# Altium PCB PCB.PcbDoc (part 2 of 2)
Units mm, origin at the board's own origin, x right, y up, seen from the top; angles counter-clockwise.
Board outline 50 x 50 mm, 4 copper layers (Top Layer, VCC, GND, Bottom Layer), stack 1.586 mm thick; 94 components, 159 nets, 762 pads, 321 vias.
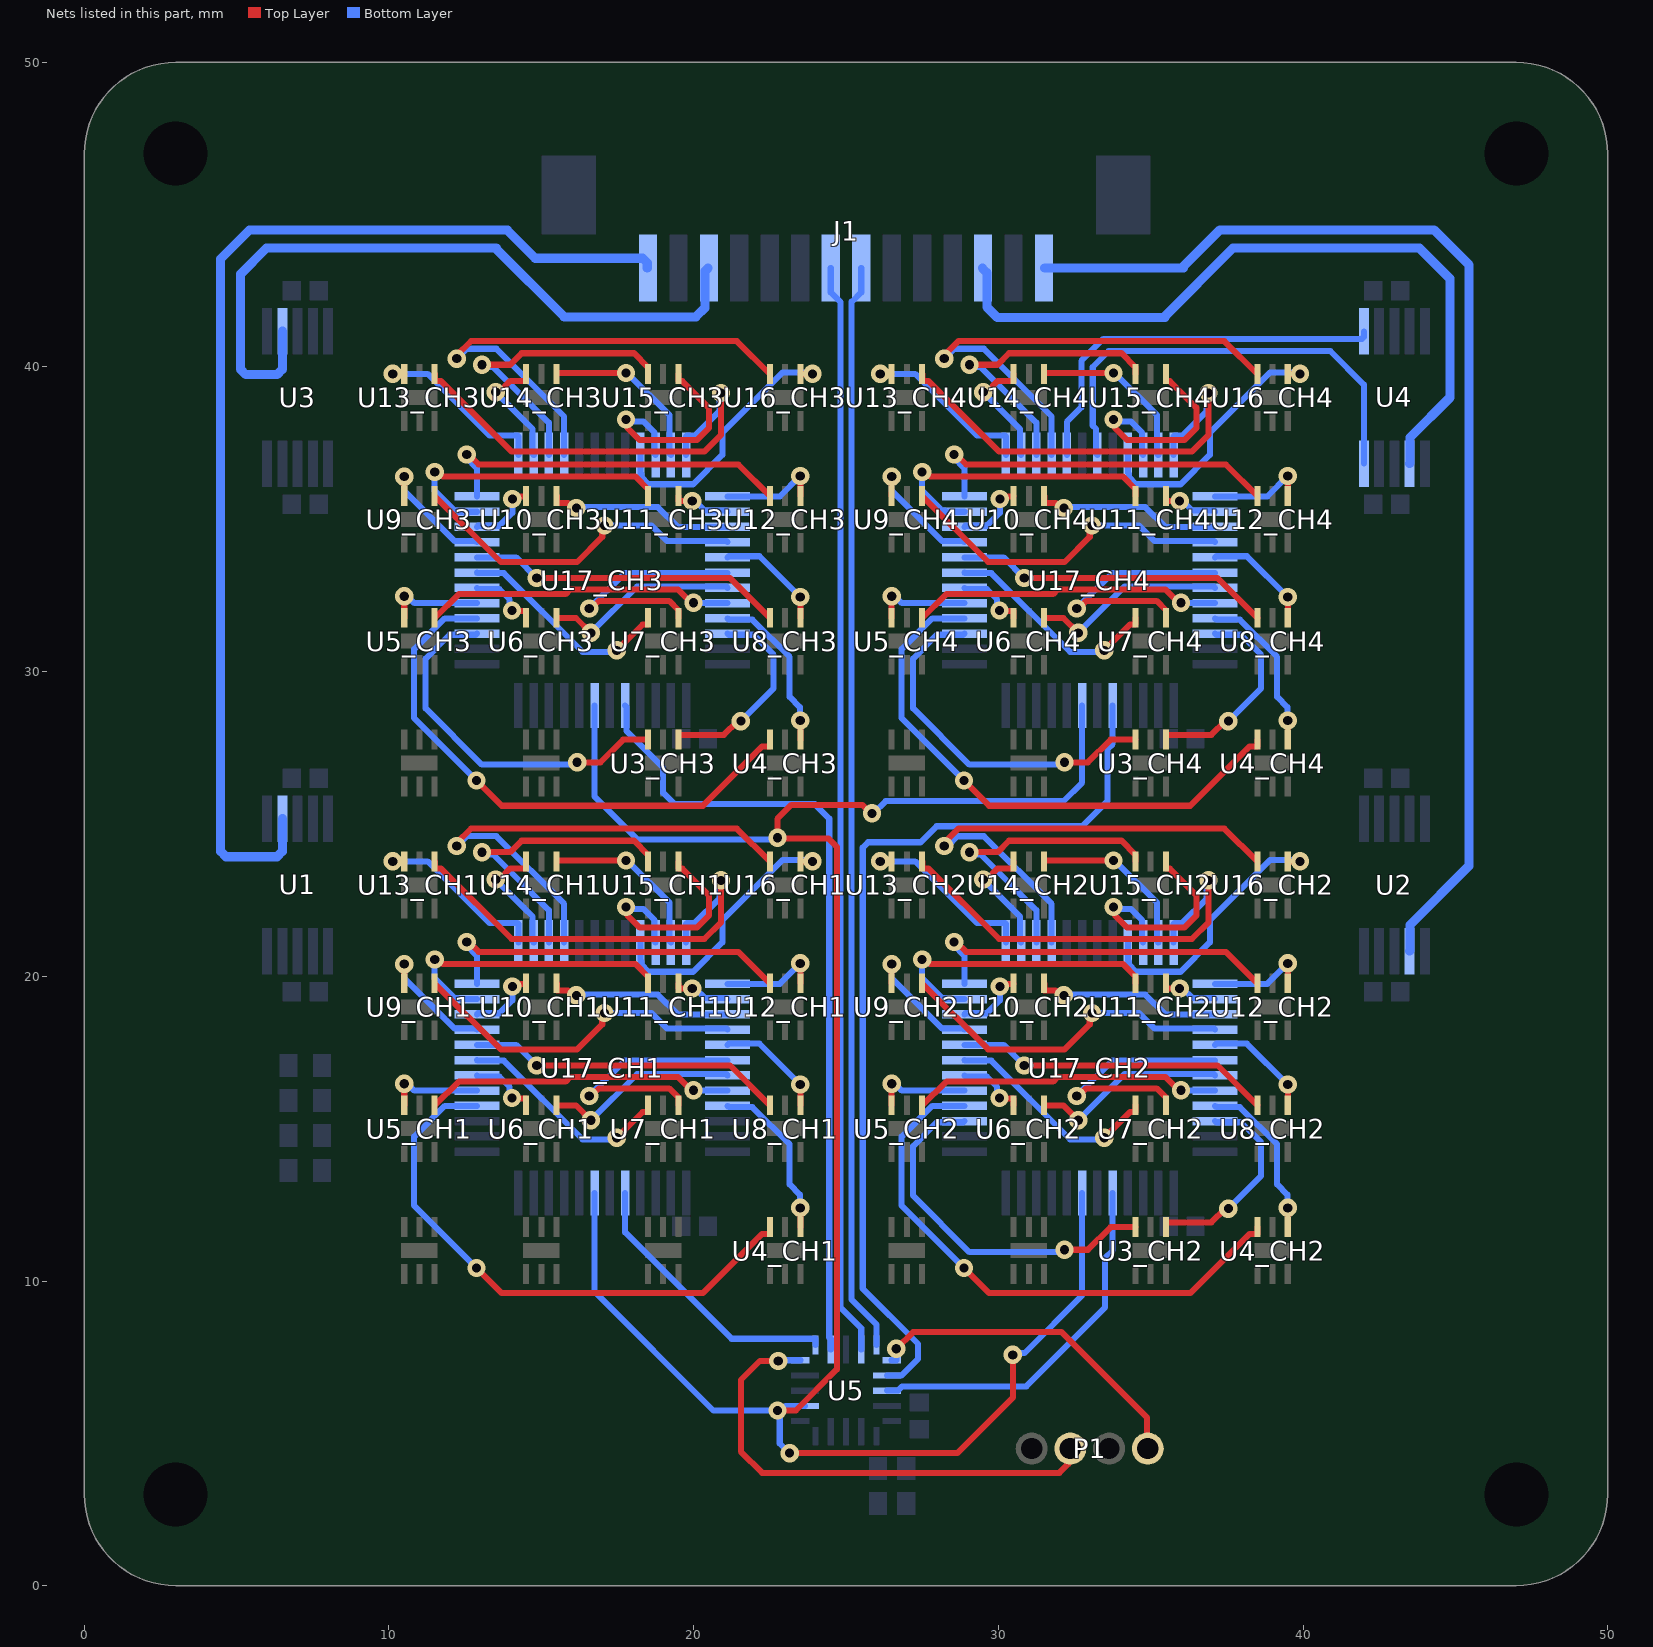
[diagram p4: the nets of this part, all layers, seen from the top]

## Via types
v1: diameter 0.6, hole 0.3, Top Layer to Bottom Layer, tented both sides, 313 vias
v2: diameter 0.9, hole 0.4, Top Layer to Bottom Layer, tented both sides, 8 vias

## Nets (pads, with @x,y where several pads share a name; then routed paths per layer and width w, separated by ;. In a path a pad name is that pad's centre, name@x,y a point inside that pad or via, vN(x,y) a via of type N, cw(c..) or ccw(c..) an arc to the next point about the centre after c; other vN are vias at no path point) (continued)
NetU3_CH2_4: U3_CH2.4 U17_CH2.10 | length 6.8
  Top Layer w0.2: U3_CH2.4@35.508,11.762 35.508,11.925 36.992,11.925 37.442,12.375 v1(37.55,12.375)
  Bottom Layer w0.2: U17_CH2.10@37.115,15.25 37.154,15.21 37.965,15.21 38.623,14.552 38.623,13.448 v1(37.55,12.375)
NetU3_CH2_6: U3_CH2.6 U17_CH2.27 | length 12.1
  Top Layer w0.2: v1(32.175,11.025) 32.942,11.025 33.687,11.77 U3_CH2.6@34.5,11.77
  Bottom Layer w0.2: U17_CH2.27@28.885,15.25 28.845,15.21 27.985,15.21 27.2,14.425 27.2,12.8 29.05,10.95 32.1,10.95 v1(32.175,11.025)
NetU3_CH3_4: U3_CH3.4 U17_CH3.10 | length 6.8
  Top Layer w0.2: U3_CH3.4@19.508,27.762 19.508,27.925 20.992,27.925 21.442,28.375 v1(21.55,28.375)
  Bottom Layer w0.2: U17_CH3.10@21.115,31.25 21.154,31.21 21.965,31.21 22.623,30.552 22.623,29.448 v1(21.55,28.375)
NetU3_CH3_6: U3_CH3.6 U17_CH3.27 | length 12.1
  Top Layer w0.2: v1(16.175,27.025) 16.942,27.025 17.687,27.77 U3_CH3.6@18.5,27.77
  Bottom Layer w0.2: U17_CH3.27@12.885,31.25 12.845,31.21 11.985,31.21 11.2,30.425 11.2,28.8 13.05,26.95 16.1,26.95 v1(16.175,27.025)
NetU3_CH4_4: U3_CH4.4 U17_CH4.10 | length 6.8
  Top Layer w0.2: U3_CH4.4@35.508,27.762 35.508,27.925 36.992,27.925 37.442,28.375 v1(37.55,28.375)
  Bottom Layer w0.2: U17_CH4.10@37.115,31.25 37.154,31.21 37.965,31.21 38.623,30.552 38.623,29.448 v1(37.55,28.375)
NetU3_CH4_6: U3_CH4.6 U17_CH4.27 | length 12.1
  Top Layer w0.2: v1(32.175,27.025) 32.942,27.025 33.687,27.77 U3_CH4.6@34.5,27.77
  Bottom Layer w0.2: U17_CH4.27@28.885,31.25 28.845,31.21 27.985,31.21 27.2,30.425 27.2,28.8 29.05,26.95 32.1,26.95 v1(32.175,27.025)
NetU4_1: U4.1 U17_CH4.41 | length 13.1
  Bottom Layer w0.2: U17_CH4.41@32.25,37.115 32.25,38.2 32.725,38.675 32.725,40.2 33.45,40.925 41.935,40.925 42,40.99 U4.1@42,41.172
NetU4_10: U4.10 U17_CH4.43 | length 15.1
  Bottom Layer w0.2: U17_CH4.43@33.25,37.115 33.21,37.154 33.21,37.965 33.1,38.075 33.1,40 33.625,40.525 40.895,40.525 42,39.42 U4.10@42,36.828
NetU4_CH1_4: U4_CH1.4 U17_CH1.9 | length 5.4
  Top Layer w0.2: v1(23.5,12.4) 23.508,12.392 U4_CH1.4@23.508,11.762
  Bottom Layer w0.2: U17_CH1.9@21.115,15.75 21.154,15.71 21.927,15.71 23.15,14.487 23.15,13.175 23.488,12.837 23.488,12.412 v1(23.5,12.4)
NetU4_CH1_6: U4_CH1.6 U17_CH1.28 | length 18.6
  Top Layer w0.2: v1(12.875,10.425) 13.7,9.6 20.3,9.6 22.245,11.545 22.5,11.545 U4_CH1.6@22.5,11.77
  Bottom Layer w0.2: v1(12.875,10.425) 10.825,12.475 10.825,14.74 11.835,15.75 U17_CH1.28@12.885,15.75
NetU4_CH2_4: U4_CH2.4 U17_CH2.9 | length 5.4
  Top Layer w0.2: v1(39.5,12.4) 39.508,12.392 U4_CH2.4@39.508,11.762
  Bottom Layer w0.2: U17_CH2.9@37.115,15.75 37.154,15.71 37.927,15.71 39.15,14.487 39.15,13.175 39.488,12.837 39.488,12.412 v1(39.5,12.4)
NetU4_CH2_6: U4_CH2.6 U17_CH2.28 | length 18.6
  Top Layer w0.2: v1(28.875,10.425) 29.7,9.6 36.3,9.6 38.245,11.545 38.5,11.545 U4_CH2.6@38.5,11.77
  Bottom Layer w0.2: v1(28.875,10.425) 26.825,12.475 26.825,14.74 27.835,15.75 U17_CH2.28@28.885,15.75
NetU4_CH3_4: U4_CH3.4 U17_CH3.9 | length 5.4
  Top Layer w0.2: v1(23.5,28.4) 23.508,28.392 U4_CH3.4@23.508,27.762
  Bottom Layer w0.2: U17_CH3.9@21.115,31.75 21.154,31.71 21.927,31.71 23.15,30.487 23.15,29.175 23.488,28.837 23.488,28.412 v1(23.5,28.4)
NetU4_CH3_6: U4_CH3.6 U17_CH3.28 | length 18.6
  Top Layer w0.2: v1(12.875,26.425) 13.7,25.6 20.3,25.6 22.245,27.545 22.5,27.545 U4_CH3.6@22.5,27.77
  Bottom Layer w0.2: v1(12.875,26.425) 10.825,28.475 10.825,30.74 11.835,31.75 U17_CH3.28@12.885,31.75
NetU4_CH4_4: U4_CH4.4 U17_CH4.9 | length 5.4
  Top Layer w0.2: v1(39.5,28.4) 39.508,28.392 U4_CH4.4@39.508,27.762
  Bottom Layer w0.2: U17_CH4.9@37.115,31.75 37.154,31.71 37.927,31.71 39.15,30.487 39.15,29.175 39.488,28.837 39.488,28.412 v1(39.5,28.4)
NetU4_CH4_6: U4_CH4.6 U17_CH4.28 | length 18.6
  Top Layer w0.2: v1(28.875,26.425) 29.7,25.6 36.3,25.6 38.245,27.545 38.5,27.545 U4_CH4.6@38.5,27.77
  Bottom Layer w0.2: v1(28.875,26.425) 26.825,28.475 26.825,30.74 27.835,31.75 U17_CH4.28@28.885,31.75
NetU5_CH1_4: U5_CH1.4 U17_CH1.8 | length 10.2
  Top Layer w0.2: U5_CH1.4@11.508,15.762 12.292,16.546 15.796,16.546 15.95,16.7 19.484,16.7 19.921,16.263 v1(19.997,16.263)
  Bottom Layer w0.2: v1(19.997,16.263) 20.004,16.256 21.108,16.256 U17_CH1.8@21.115,16.25
NetU5_CH1_6: U5_CH1.6 U17_CH1.29 | length 3.2
  Top Layer w0.2: U5_CH1.6@10.5,15.77 v1(10.5,16.475)
  Bottom Layer w0.2: v1(10.5,16.475) 10.608,16.475 10.833,16.25 U17_CH1.29@12.885,16.25
NetU5_CH2_4: U5_CH2.4 U17_CH2.8 | length 10.2
  Top Layer w0.2: U5_CH2.4@27.508,15.762 28.292,16.546 31.796,16.546 31.95,16.7 35.484,16.7 35.921,16.263 v1(35.997,16.263)
  Bottom Layer w0.2: v1(35.997,16.263) 36.004,16.256 37.108,16.256 U17_CH2.8@37.115,16.25
NetU5_CH2_6: U5_CH2.6 U17_CH2.29 | length 3.2
  Top Layer w0.2: U5_CH2.6@26.5,15.77 v1(26.5,16.475)
  Bottom Layer w0.2: v1(26.5,16.475) 26.608,16.475 26.833,16.25 U17_CH2.29@28.885,16.25
NetU5_CH3_4: U5_CH3.4 U17_CH3.8 | length 10.2
  Top Layer w0.2: U5_CH3.4@11.508,31.762 12.292,32.546 15.796,32.546 15.95,32.7 19.484,32.7 19.921,32.263 v1(19.997,32.263)
  Bottom Layer w0.2: v1(19.997,32.263) 20.004,32.256 21.108,32.256 U17_CH3.8@21.115,32.25
NetU5_CH3_6: U5_CH3.6 U17_CH3.29 | length 3.2
  Top Layer w0.2: U5_CH3.6@10.5,31.77 v1(10.5,32.475)
  Bottom Layer w0.2: v1(10.5,32.475) 10.608,32.475 10.833,32.25 U17_CH3.29@12.885,32.25
NetU5_CH4_4: U5_CH4.4 U17_CH4.8 | length 10.2
  Top Layer w0.2: U5_CH4.4@27.508,31.762 28.292,32.546 31.796,32.546 31.95,32.7 35.484,32.7 35.921,32.263 v1(35.997,32.263)
  Bottom Layer w0.2: v1(35.997,32.263) 36.004,32.256 37.108,32.256 U17_CH4.8@37.115,32.25
NetU5_CH4_6: U5_CH4.6 U17_CH4.29 | length 3.2
  Top Layer w0.2: U5_CH4.6@26.5,31.77 v1(26.5,32.475)
  Bottom Layer w0.2: v1(26.5,32.475) 26.608,32.475 26.833,32.25 U17_CH4.29@28.885,32.25
NetU6_CH1_4: U6_CH1.4 U17_CH1.7 | length 6.5
  Top Layer w0.2: U6_CH1.4@15.508,15.762 16.138,15.762 v1(16.625,15.275)
  Bottom Layer w0.2: v1(16.625,15.275) 18.14,16.79 21.075,16.79 U17_CH1.7@21.115,16.75
NetU6_CH1_6: U6_CH1.6 U17_CH1.30 | length 2.3
  Top Layer w0.2: v1(14.037,16.009) 14.051,15.995 14.5,15.995 U6_CH1.6@14.5,15.77
  Bottom Layer w0.2: U17_CH1.30@12.885,16.75 12.925,16.71 13.622,16.71 13.96,16.372 13.96,16.086 v1(14.037,16.009)
NetU6_CH2_4: U6_CH2.4 U17_CH2.7 | length 6.5
  Top Layer w0.2: U6_CH2.4@31.508,15.762 32.138,15.762 v1(32.625,15.275)
  Bottom Layer w0.2: v1(32.625,15.275) 34.14,16.79 37.075,16.79 U17_CH2.7@37.115,16.75
NetU6_CH2_6: U6_CH2.6 U17_CH2.30 | length 2.3
  Top Layer w0.2: v1(30.037,16.009) 30.051,15.995 30.5,15.995 U6_CH2.6@30.5,15.77
  Bottom Layer w0.2: U17_CH2.30@28.885,16.75 28.925,16.71 29.622,16.71 29.96,16.372 29.96,16.086 v1(30.037,16.009)
NetU6_CH3_4: U6_CH3.4 U17_CH3.7 | length 6.5
  Top Layer w0.2: U6_CH3.4@15.508,31.762 16.138,31.762 v1(16.625,31.275)
  Bottom Layer w0.2: v1(16.625,31.275) 18.14,32.79 21.075,32.79 U17_CH3.7@21.115,32.75
NetU6_CH3_6: U6_CH3.6 U17_CH3.30 | length 2.3
  Top Layer w0.2: v1(14.037,32.009) 14.051,31.995 14.5,31.995 U6_CH3.6@14.5,31.77
  Bottom Layer w0.2: U17_CH3.30@12.885,32.75 12.925,32.71 13.622,32.71 13.96,32.372 13.96,32.086 v1(14.037,32.009)
NetU6_CH4_4: U6_CH4.4 U17_CH4.7 | length 6.5
  Top Layer w0.2: U6_CH4.4@31.508,31.762 32.138,31.762 v1(32.625,31.275)
  Bottom Layer w0.2: v1(32.625,31.275) 34.14,32.79 37.075,32.79 U17_CH4.7@37.115,32.75
NetU6_CH4_6: U6_CH4.6 U17_CH4.30 | length 2.3
  Top Layer w0.2: v1(30.037,32.009) 30.051,31.995 30.5,31.995 U6_CH4.6@30.5,31.77
  Bottom Layer w0.2: U17_CH4.30@28.885,32.75 28.925,32.71 29.622,32.71 29.96,32.372 29.96,32.086 v1(30.037,32.009)
NetU7_CH1_4: U7_CH1.4 U17_CH1.6 | length 8.4
  Top Layer w0.2: v1(16.575,16.075) 16.645,16.075 16.892,16.322 19.194,16.322 19.508,16.008 U7_CH1.4@19.508,15.762
  Bottom Layer w0.2: v1(16.575,16.075) 17.736,17.236 U17_CH1.6@21.115,17.236
NetU7_CH1_6: U7_CH1.6 U17_CH1.31 | length 7.3
  Top Layer w0.2: v1(17.475,14.7) 18.32,15.545 18.5,15.545 U7_CH1.6@18.5,15.77
  Bottom Layer w0.2: U17_CH1.31@12.885,17.25 12.903,17.232 13.768,17.232 16.352,14.648 17.423,14.648 v1(17.475,14.7)
NetU7_CH2_4: U7_CH2.4 U17_CH2.6 | length 8.4
  Top Layer w0.2: v1(32.575,16.075) 32.645,16.075 32.892,16.322 35.194,16.322 35.508,16.008 U7_CH2.4@35.508,15.762
  Bottom Layer w0.2: v1(32.575,16.075) 33.736,17.236 U17_CH2.6@37.115,17.236
NetU7_CH2_6: U7_CH2.6 U17_CH2.31 | length 7.3
  Top Layer w0.2: v1(33.475,14.7) 34.32,15.545 34.5,15.545 U7_CH2.6@34.5,15.77
  Bottom Layer w0.2: U17_CH2.31@28.885,17.25 28.903,17.232 29.768,17.232 32.352,14.648 33.423,14.648 v1(33.475,14.7)
NetU7_CH3_4: U7_CH3.4 U17_CH3.6 | length 8.4
  Top Layer w0.2: v1(16.575,32.075) 16.645,32.075 16.892,32.322 19.194,32.322 19.508,32.008 U7_CH3.4@19.508,31.762
  Bottom Layer w0.2: v1(16.575,32.075) 17.736,33.236 U17_CH3.6@21.115,33.236
NetU7_CH3_6: U7_CH3.6 U17_CH3.31 | length 7.3
  Top Layer w0.2: v1(17.475,30.7) 18.32,31.545 18.5,31.545 U7_CH3.6@18.5,31.77
  Bottom Layer w0.2: U17_CH3.31@12.885,33.25 12.903,33.232 13.768,33.232 16.352,30.648 17.423,30.648 v1(17.475,30.7)
NetU7_CH4_4: U7_CH4.4 U17_CH4.6 | length 8.4
  Top Layer w0.2: v1(32.575,32.075) 32.645,32.075 32.892,32.322 35.194,32.322 35.508,32.008 U7_CH4.4@35.508,31.762
  Bottom Layer w0.2: v1(32.575,32.075) 33.736,33.236 U17_CH4.6@37.115,33.236
NetU7_CH4_6: U7_CH4.6 U17_CH4.31 | length 7.3
  Top Layer w0.2: v1(33.475,30.7) 34.32,31.545 34.5,31.545 U7_CH4.6@34.5,31.77
  Bottom Layer w0.2: U17_CH4.31@28.885,33.25 28.903,33.232 29.768,33.232 32.352,30.648 33.423,30.648 v1(33.475,30.7)
NetU8_CH1_4: U8_CH1.4 U17_CH1.5 | length 3.6
  Top Layer w0.2: v1(23.5,16.45) 23.508,16.442 U8_CH1.4@23.508,15.762
  Bottom Layer w0.2: U17_CH1.5@21.115,17.75 21.154,17.79 22.16,17.79 v1(23.5,16.45)
NetU8_CH1_6: U8_CH1.6 U17_CH1.32 | length 10.4
  Top Layer w0.2: v1(14.85,17.073) 21.197,17.073 U8_CH1.6@22.5,15.77
  Bottom Layer w0.2: U17_CH1.32@12.885,17.75 14.173,17.75 v1(14.85,17.073)
NetU8_CH2_4: U8_CH2.4 U17_CH2.5 | length 3.6
  Top Layer w0.2: v1(39.5,16.45) 39.508,16.442 U8_CH2.4@39.508,15.762
  Bottom Layer w0.2: U17_CH2.5@37.115,17.75 37.154,17.79 38.16,17.79 v1(39.5,16.45)
NetU8_CH2_6: U8_CH2.6 U17_CH2.32 | length 10.4
  Top Layer w0.2: v1(30.85,17.073) 37.197,17.073 U8_CH2.6@38.5,15.77
  Bottom Layer w0.2: U17_CH2.32@28.885,17.75 30.173,17.75 v1(30.85,17.073)
NetU8_CH3_4: U8_CH3.4 U17_CH3.5 | length 3.6
  Top Layer w0.2: v1(23.5,32.45) 23.508,32.442 U8_CH3.4@23.508,31.762
  Bottom Layer w0.2: U17_CH3.5@21.115,33.75 21.154,33.79 22.16,33.79 v1(23.5,32.45)
NetU8_CH3_6: U8_CH3.6 U17_CH3.32 | length 10.4
  Top Layer w0.2: v1(14.85,33.073) 21.197,33.073 U8_CH3.6@22.5,31.77
  Bottom Layer w0.2: U17_CH3.32@12.885,33.75 14.173,33.75 v1(14.85,33.073)
NetU8_CH4_4: U8_CH4.4 U17_CH4.5 | length 3.6
  Top Layer w0.2: v1(39.5,32.45) 39.508,32.442 U8_CH4.4@39.508,31.762
  Bottom Layer w0.2: U17_CH4.5@37.115,33.75 37.154,33.79 38.16,33.79 v1(39.5,32.45)
NetU8_CH4_6: U8_CH4.6 U17_CH4.32 | length 10.4
  Top Layer w0.2: v1(30.85,33.073) 37.197,33.073 U8_CH4.6@38.5,31.77
  Bottom Layer w0.2: U17_CH4.32@28.885,33.75 30.173,33.75 v1(30.85,33.073)
NetU9_CH1_4: U9_CH1.4 U17_CH1.4 | length 11.4
  Top Layer w0.2: U9_CH1.4@11.508,19.762 13.67,17.6 16.175,17.6 17.001,18.426 17.001,18.726 v1(17.075,18.8)
  Bottom Layer w0.2: v1(17.075,18.8) 18.613,18.8 19.124,18.29 21.075,18.29 U17_CH1.4@21.115,18.25
NetU9_CH1_6: U9_CH1.6 U17_CH1.33 | length 4.2
  Top Layer w0.2: U9_CH1.6@10.5,19.77 v1(10.5,20.4)
  Bottom Layer w0.2: v1(10.5,20.4) 10.5,19.938 12.055,18.383 12.148,18.29 12.845,18.29 U17_CH1.33@12.885,18.25
NetU9_CH2_4: U9_CH2.4 U17_CH2.4 | length 11.4
  Top Layer w0.2: U9_CH2.4@27.508,19.762 29.67,17.6 32.175,17.6 33.001,18.426 33.001,18.726 v1(33.075,18.8)
  Bottom Layer w0.2: v1(33.075,18.8) 34.613,18.8 35.124,18.29 37.075,18.29 U17_CH2.4@37.115,18.25
NetU9_CH2_6: U9_CH2.6 U17_CH2.33 | length 4.2
  Top Layer w0.2: U9_CH2.6@26.5,19.77 v1(26.5,20.4)
  Bottom Layer w0.2: v1(26.5,20.4) 26.5,19.938 28.055,18.383 28.148,18.29 28.845,18.29 U17_CH2.33@28.885,18.25
NetU9_CH3_4: U9_CH3.4 U17_CH3.4 | length 11.4
  Top Layer w0.2: U9_CH3.4@11.508,35.762 13.67,33.6 16.175,33.6 17.001,34.426 17.001,34.726 v1(17.075,34.8)
  Bottom Layer w0.2: v1(17.075,34.8) 18.613,34.8 19.124,34.29 21.075,34.29 U17_CH3.4@21.115,34.25
NetU9_CH3_6: U9_CH3.6 U17_CH3.33 | length 4.2
  Top Layer w0.2: U9_CH3.6@10.5,35.77 v1(10.5,36.4)
  Bottom Layer w0.2: v1(10.5,36.4) 10.5,35.938 12.055,34.383 12.148,34.29 12.845,34.29 U17_CH3.33@12.885,34.25
NetU9_CH4_4: U9_CH4.4 U17_CH4.4 | length 11.4
  Top Layer w0.2: U9_CH4.4@27.508,35.762 29.67,33.6 32.175,33.6 33.001,34.426 33.001,34.726 v1(33.075,34.8)
  Bottom Layer w0.2: v1(33.075,34.8) 34.613,34.8 35.124,34.29 37.075,34.29 U17_CH4.4@37.115,34.25
NetU9_CH4_6: U9_CH4.6 U17_CH4.33 | length 4.2
  Top Layer w0.2: U9_CH4.6@26.5,35.77 v1(26.5,36.4)
  Bottom Layer w0.2: v1(26.5,36.4) 26.5,35.938 28.055,34.383 28.148,34.29 28.845,34.29 U17_CH4.33@28.885,34.25
NetU10_CH1_4: U10_CH1.4 U17_CH1.3 | length 6.2
  Top Layer w0.2: U10_CH1.4@15.508,19.762 15.508,19.537 15.88,19.537 16.042,19.375 v1(16.15,19.375)
  Bottom Layer w0.2: v1(16.15,19.375) 16.175,19.4 18.825,19.4 19.475,18.75 U17_CH1.3@21.115,18.75
NetU10_CH1_6: U10_CH1.6 U17_CH1.34 | length 2.4
  Top Layer w0.2: v1(14.049,19.669) 14.049,19.75 14.5,19.75 U10_CH1.6@14.5,19.77
  Bottom Layer w0.2: U17_CH1.34@12.885,18.75 12.925,18.79 13.622,18.79 14.049,19.216 v1(14.049,19.669)
NetU10_CH2_4: U10_CH2.4 U17_CH2.3 | length 6.2
  Top Layer w0.2: U10_CH2.4@31.508,19.762 31.508,19.537 31.88,19.537 32.042,19.375 v1(32.15,19.375)
  Bottom Layer w0.2: v1(32.15,19.375) 32.175,19.4 34.825,19.4 35.475,18.75 U17_CH2.3@37.115,18.75
NetU10_CH2_6: U10_CH2.6 U17_CH2.34 | length 2.4
  Top Layer w0.2: v1(30.049,19.669) 30.049,19.75 30.5,19.75 U10_CH2.6@30.5,19.77
  Bottom Layer w0.2: U17_CH2.34@28.885,18.75 28.925,18.79 29.622,18.79 30.049,19.216 v1(30.049,19.669)
NetU10_CH3_4: U10_CH3.4 U17_CH3.3 | length 6.2
  Top Layer w0.2: U10_CH3.4@15.508,35.762 15.508,35.537 15.88,35.537 16.042,35.375 v1(16.15,35.375)
  Bottom Layer w0.2: v1(16.15,35.375) 16.175,35.4 18.825,35.4 19.475,34.75 U17_CH3.3@21.115,34.75
NetU10_CH3_6: U10_CH3.6 U17_CH3.34 | length 2.4
  Top Layer w0.2: v1(14.049,35.669) 14.049,35.75 14.5,35.75 U10_CH3.6@14.5,35.77
  Bottom Layer w0.2: U17_CH3.34@12.885,34.75 12.925,34.79 13.622,34.79 14.049,35.216 v1(14.049,35.669)
NetU10_CH4_4: U10_CH4.4 U17_CH4.3 | length 6.2
  Top Layer w0.2: U10_CH4.4@31.508,35.762 31.508,35.537 31.88,35.537 32.042,35.375 v1(32.15,35.375)
  Bottom Layer w0.2: v1(32.15,35.375) 32.175,35.4 34.825,35.4 35.475,34.75 U17_CH4.3@37.115,34.75
NetU10_CH4_6: U10_CH4.6 U17_CH4.34 | length 2.4
  Top Layer w0.2: v1(30.049,35.669) 30.049,35.75 30.5,35.75 U10_CH4.6@30.5,35.77
  Bottom Layer w0.2: U17_CH4.34@28.885,34.75 28.925,34.79 29.622,34.79 30.049,35.216 v1(30.049,35.669)
NetU11_CH1_4: U11_CH1.4 U17_CH1.2 | length 1.9
  Top Layer w0.2: U11_CH1.4@19.508,19.762 19.508,19.599 v1(19.951,19.599)
  Bottom Layer w0.2: v1(19.951,19.599) 20.06,19.599 20.369,19.29 21.075,19.29 U17_CH1.2@21.115,19.25
NetU11_CH1_6: U11_CH1.6 U17_CH1.35 | length 9.7
  Top Layer w0.2: v1(11.5,20.55) 11.608,20.55 11.758,20.4 18.095,20.4 18.5,19.995 U11_CH1.6@18.5,19.77
  Bottom Layer w0.2: v1(11.5,20.55) 11.5,19.938 12.055,19.383 12.148,19.29 12.249,19.29 12.288,19.25 U17_CH1.35@12.885,19.25
NetU11_CH2_4: U11_CH2.4 U17_CH2.2 | length 1.9
  Top Layer w0.2: U11_CH2.4@35.508,19.762 35.508,19.599 v1(35.951,19.599)
  Bottom Layer w0.2: v1(35.951,19.599) 36.06,19.599 36.369,19.29 37.075,19.29 U17_CH2.2@37.115,19.25
NetU11_CH2_6: U11_CH2.6 U17_CH2.35 | length 9.7
  Top Layer w0.2: v1(27.5,20.55) 27.608,20.55 27.758,20.4 34.095,20.4 34.5,19.995 U11_CH2.6@34.5,19.77
  Bottom Layer w0.2: v1(27.5,20.55) 27.5,19.938 28.055,19.383 28.148,19.29 28.249,19.29 28.288,19.25 U17_CH2.35@28.885,19.25
NetU11_CH3_4: U11_CH3.4 U17_CH3.2 | length 1.9
  Top Layer w0.2: U11_CH3.4@19.508,35.762 19.508,35.599 v1(19.951,35.599)
  Bottom Layer w0.2: v1(19.951,35.599) 20.06,35.599 20.369,35.29 21.075,35.29 U17_CH3.2@21.115,35.25
NetU11_CH3_6: U11_CH3.6 U17_CH3.35 | length 9.7
  Top Layer w0.2: v1(11.5,36.55) 11.608,36.55 11.758,36.4 18.095,36.4 18.5,35.995 U11_CH3.6@18.5,35.77
  Bottom Layer w0.2: v1(11.5,36.55) 11.5,35.938 12.055,35.383 12.148,35.29 12.249,35.29 12.288,35.25 U17_CH3.35@12.885,35.25
NetU11_CH4_4: U11_CH4.4 U17_CH4.2 | length 1.9
  Top Layer w0.2: U11_CH4.4@35.508,35.762 35.508,35.599 v1(35.951,35.599)
  Bottom Layer w0.2: v1(35.951,35.599) 36.06,35.599 36.369,35.29 37.075,35.29 U17_CH4.2@37.115,35.25
NetU11_CH4_6: U11_CH4.6 U17_CH4.35 | length 9.7
  Top Layer w0.2: v1(27.5,36.55) 27.608,36.55 27.758,36.4 34.095,36.4 34.5,35.995 U11_CH4.6@34.5,35.77
  Bottom Layer w0.2: v1(27.5,36.55) 27.5,35.938 28.055,35.383 28.148,35.29 28.249,35.29 28.288,35.25 U17_CH4.35@28.885,35.25
NetU12_CH1_4: U12_CH1.4 U17_CH1.1 | length 3.3
  Top Layer w0.2: v1(23.5,20.425) 23.508,20.417 U12_CH1.4@23.508,19.762
  Bottom Layer w0.2: U17_CH1.1@21.115,19.75 22.825,19.75 v1(23.5,20.425)
NetU12_CH1_6: U12_CH1.6 U17_CH1.36 | length 12
  Top Layer w0.2: v1(12.55,21.125) 12.619,21.125 12.944,20.8 21.47,20.8 U12_CH1.6@22.5,19.77
  Bottom Layer w0.2: v1(12.55,21.125) 12.55,21.017 12.885,20.682 U17_CH1.36@12.885,19.75
NetU12_CH2_4: U12_CH2.4 U17_CH2.1 | length 3.3
  Top Layer w0.2: v1(39.5,20.425) 39.508,20.417 U12_CH2.4@39.508,19.762
  Bottom Layer w0.2: U17_CH2.1@37.115,19.75 38.825,19.75 v1(39.5,20.425)
NetU12_CH2_6: U12_CH2.6 U17_CH2.36 | length 12
  Top Layer w0.2: v1(28.55,21.125) 28.619,21.125 28.944,20.8 37.47,20.8 U12_CH2.6@38.5,19.77
  Bottom Layer w0.2: v1(28.55,21.125) 28.55,21.017 28.885,20.682 U17_CH2.36@28.885,19.75
NetU12_CH3_4: U12_CH3.4 U17_CH3.1 | length 3.3
  Top Layer w0.2: v1(23.5,36.425) 23.508,36.417 U12_CH3.4@23.508,35.762
  Bottom Layer w0.2: U17_CH3.1@21.115,35.75 22.825,35.75 v1(23.5,36.425)
NetU12_CH3_6: U12_CH3.6 U17_CH3.36 | length 12
  Top Layer w0.2: v1(12.55,37.125) 12.619,37.125 12.944,36.8 21.47,36.8 U12_CH3.6@22.5,35.77
  Bottom Layer w0.2: v1(12.55,37.125) 12.55,37.017 12.885,36.682 U17_CH3.36@12.885,35.75
NetU12_CH4_4: U12_CH4.4 U17_CH4.1 | length 3.3
  Top Layer w0.2: v1(39.5,36.425) 39.508,36.417 U12_CH4.4@39.508,35.762
  Bottom Layer w0.2: U17_CH4.1@37.115,35.75 38.825,35.75 v1(39.5,36.425)
NetU12_CH4_6: U12_CH4.6 U17_CH4.36 | length 12
  Top Layer w0.2: v1(28.55,37.125) 28.619,37.125 28.944,36.8 37.47,36.8 U12_CH4.6@38.5,35.77
  Bottom Layer w0.2: v1(28.55,37.125) 28.55,37.017 28.885,36.682 U17_CH4.36@28.885,35.75
NetU13_CH1_4: U13_CH1.4 U17_CH1.48 | length 14.8
  Top Layer w0.2: U13_CH1.4@11.508,23.762 11.508,23.537 11.713,23.537 14.025,21.225 20.35,21.225 20.9,21.775 v1(20.9,23.15)
  Bottom Layer w0.2: U17_CH1.48@19.75,21.115 19.75,21.712 19.79,21.751 20.043,21.751 20.841,22.55 20.841,23.091 v1(20.9,23.15)
NetU13_CH1_6: U13_CH1.6 U17_CH1.37 | length 6
  Top Layer w0.2: v1(10.125,23.775) 10.5,23.775 U13_CH1.6@10.5,23.77
  Bottom Layer w0.2: v1(10.125,23.775) 11.27,23.775 13.294,21.751 14.21,21.751 14.25,21.712 U17_CH1.37@14.25,21.115
NetU13_CH2_4: U13_CH2.4 U17_CH2.48 | length 14.8
  Top Layer w0.2: U13_CH2.4@27.508,23.762 27.508,23.537 27.713,23.537 30.025,21.225 36.35,21.225 36.9,21.775 v1(36.9,23.15)
  Bottom Layer w0.2: U17_CH2.48@35.75,21.115 35.75,21.712 35.79,21.751 36.043,21.751 36.841,22.55 36.841,23.091 v1(36.9,23.15)
NetU13_CH2_6: U13_CH2.6 U17_CH2.37 | length 6
  Top Layer w0.2: v1(26.125,23.775) 26.5,23.775 U13_CH2.6@26.5,23.77
  Bottom Layer w0.2: v1(26.125,23.775) 27.27,23.775 29.294,21.751 30.21,21.751 30.25,21.712 U17_CH2.37@30.25,21.115
NetU13_CH3_4: U13_CH3.4 U17_CH3.48 | length 14.8
  Top Layer w0.2: U13_CH3.4@11.508,39.762 11.508,39.537 11.713,39.537 14.025,37.225 20.35,37.225 20.9,37.775 v1(20.9,39.15)
  Bottom Layer w0.2: U17_CH3.48@19.75,37.115 19.75,37.712 19.79,37.751 20.043,37.751 20.841,38.55 20.841,39.091 v1(20.9,39.15)
NetU13_CH3_6: U13_CH3.6 U17_CH3.37 | length 6
  Top Layer w0.2: v1(10.125,39.775) 10.5,39.775 U13_CH3.6@10.5,39.77
  Bottom Layer w0.2: v1(10.125,39.775) 11.27,39.775 13.294,37.751 14.21,37.751 14.25,37.712 U17_CH3.37@14.25,37.115
NetU13_CH4_4: U13_CH4.4 U17_CH4.48 | length 14.8
  Top Layer w0.2: U13_CH4.4@27.508,39.762 27.508,39.537 27.713,39.537 30.025,37.225 36.35,37.225 36.9,37.775 v1(36.9,39.15)
  Bottom Layer w0.2: U17_CH4.48@35.75,37.115 35.75,37.712 35.79,37.751 36.043,37.751 36.841,38.55 36.841,39.091 v1(36.9,39.15)
NetU13_CH4_6: U13_CH4.6 U17_CH4.37 | length 6
  Top Layer w0.2: v1(26.125,39.775) 26.5,39.775 U13_CH4.6@26.5,39.77
  Bottom Layer w0.2: v1(26.125,39.775) 27.27,39.775 29.294,37.751 30.21,37.751 30.25,37.712 U17_CH4.37@30.25,37.115
NetU14_CH1_4: U14_CH1.4 U17_CH1.47 | length 5.6
  Top Layer w0.2: U14_CH1.4@15.508,23.762 15.508,23.8 v1(17.777,23.8)
  Bottom Layer w0.2: v1(17.777,23.8) 17.825,23.8 19.21,22.415 19.21,21.154 U17_CH1.47@19.25,21.115
NetU14_CH1_6: U14_CH1.6 U17_CH1.38 | length 4
  Top Layer w0.2: v1(13.504,23.175) 13.612,23.175 13.982,23.545 14.5,23.545 U14_CH1.6@14.5,23.77
  Bottom Layer w0.2: v1(13.504,23.175) 14.425,22.254 14.71,21.968 14.71,21.154 U17_CH1.38@14.75,21.115
NetU14_CH2_4: U14_CH2.4 U17_CH2.47 | length 5.6
  Top Layer w0.2: U14_CH2.4@31.508,23.762 31.508,23.8 v1(33.777,23.8)
  Bottom Layer w0.2: v1(33.777,23.8) 33.825,23.8 35.21,22.415 35.21,21.154 U17_CH2.47@35.25,21.115
NetU14_CH2_6: U14_CH2.6 U17_CH2.38 | length 4
  Top Layer w0.2: v1(29.504,23.175) 29.612,23.175 29.982,23.545 30.5,23.545 U14_CH2.6@30.5,23.77
  Bottom Layer w0.2: v1(29.504,23.175) 30.425,22.254 30.71,21.968 30.71,21.154 U17_CH2.38@30.75,21.115
NetU14_CH3_4: U14_CH3.4 U17_CH3.47 | length 5.6
  Top Layer w0.2: U14_CH3.4@15.508,39.762 15.508,39.8 v1(17.777,39.8)
  Bottom Layer w0.2: v1(17.777,39.8) 17.825,39.8 19.21,38.415 19.21,37.154 U17_CH3.47@19.25,37.115
NetU14_CH3_6: U14_CH3.6 U17_CH3.38 | length 4
  Top Layer w0.2: v1(13.504,39.175) 13.612,39.175 13.982,39.545 14.5,39.545 U14_CH3.6@14.5,39.77
  Bottom Layer w0.2: v1(13.504,39.175) 14.425,38.254 14.71,37.968 14.71,37.154 U17_CH3.38@14.75,37.115
NetU14_CH4_4: U14_CH4.4 U17_CH4.47 | length 5.6
  Top Layer w0.2: U14_CH4.4@31.508,39.762 31.508,39.8 v1(33.777,39.8)
  Bottom Layer w0.2: v1(33.777,39.8) 33.825,39.8 35.21,38.415 35.21,37.154 U17_CH4.47@35.25,37.115
NetU14_CH4_6: U14_CH4.6 U17_CH4.38 | length 4
  Top Layer w0.2: v1(29.504,39.175) 29.612,39.175 29.982,39.545 30.5,39.545 U14_CH4.6@30.5,39.77
  Bottom Layer w0.2: v1(29.504,39.175) 30.425,38.254 30.71,37.968 30.71,37.154 U17_CH4.38@30.75,37.115
NetU15_CH1_4: U15_CH1.4 U17_CH1.46 | length 7.4
  Top Layer w0.2: v1(17.777,22.278) 17.827,22.229 17.827,21.998 18.225,21.6 20.108,21.6 20.5,21.992 20.5,22.666 19.629,23.537 19.508,23.537 U15_CH1.4@19.508,23.762
  Bottom Layer w0.2: v1(17.777,22.278) 17.843,22.212 18.35,22.212 18.71,21.852 18.71,21.154 U17_CH1.46@18.75,21.115
NetU15_CH1_6: U15_CH1.6 U17_CH1.39 | length 10.1
  Top Layer w0.2: v1(13.05,24.073) 13.052,24.075 13.975,24.075 14.35,24.45 18.045,24.45 18.5,23.995 U15_CH1.6@18.5,23.77
  Bottom Layer w0.2: v1(13.05,24.073) 13.125,23.998 13.425,23.998 15.25,22.174 U17_CH1.39@15.25,21.115
NetU15_CH2_4: U15_CH2.4 U17_CH2.46 | length 7.4
  Top Layer w0.2: v1(33.777,22.278) 33.827,22.229 33.827,21.998 34.225,21.6 36.108,21.6 36.5,21.992 36.5,22.666 35.629,23.537 35.508,23.537 U15_CH2.4@35.508,23.762
  Bottom Layer w0.2: v1(33.777,22.278) 33.843,22.212 34.35,22.212 34.71,21.852 34.71,21.154 U17_CH2.46@34.75,21.115
NetU15_CH2_6: U15_CH2.6 U17_CH2.39 | length 10.1
  Top Layer w0.2: v1(29.05,24.071) 29.054,24.075 29.975,24.075 30.35,24.45 34.045,24.45 34.5,23.995 U15_CH2.6@34.5,23.77
  Bottom Layer w0.2: v1(29.05,24.071) 29.123,23.998 29.425,23.998 31.25,22.174 U17_CH2.39@31.25,21.115
NetU15_CH3_4: U15_CH3.4 U17_CH3.46 | length 7.4
  Top Layer w0.2: v1(17.777,38.278) 17.827,38.229 17.827,37.998 18.225,37.6 20.108,37.6 20.5,37.992 20.5,38.666 19.629,39.537 19.508,39.537 U15_CH3.4@19.508,39.762
  Bottom Layer w0.2: v1(17.777,38.278) 17.843,38.212 18.35,38.212 18.71,37.852 18.71,37.154 U17_CH3.46@18.75,37.115
NetU15_CH3_6: U15_CH3.6 U17_CH3.39 | length 10.1
  Top Layer w0.2: v1(13.05,40.073) 13.052,40.075 13.975,40.075 14.35,40.45 18.045,40.45 18.5,39.995 U15_CH3.6@18.5,39.77
  Bottom Layer w0.2: v1(13.05,40.073) 13.125,39.998 13.425,39.998 15.25,38.174 U17_CH3.39@15.25,37.115
NetU15_CH4_4: U15_CH4.4 U17_CH4.46 | length 7.4
  Top Layer w0.2: v1(33.777,38.278) 33.827,38.229 33.827,37.998 34.225,37.6 36.108,37.6 36.5,37.992 36.5,38.666 35.629,39.537 35.508,39.537 U15_CH4.4@35.508,39.762
  Bottom Layer w0.2: v1(33.777,38.278) 33.843,38.212 34.35,38.212 34.71,37.852 34.71,37.154 U17_CH4.46@34.75,37.115
NetU15_CH4_6: U15_CH4.6 U17_CH4.39 | length 10.1
  Top Layer w0.2: v1(29.05,40.073) 29.052,40.075 29.975,40.075 30.35,40.45 34.045,40.45 34.5,39.995 U15_CH4.6@34.5,39.77
  Bottom Layer w0.2: v1(29.05,40.073) 29.125,39.998 29.425,39.998 31.25,38.174 U17_CH4.39@31.25,37.115
NetU16_CH1_4: U16_CH1.4 U17_CH1.45 | length 8.8
  Top Layer w0.2: U16_CH1.4@23.508,23.762 23.508,23.775 v1(23.9,23.775)
  Bottom Layer w0.2: U17_CH1.45@18.25,21.115 18.25,20.518 18.29,20.478 18.29,20.378 18.516,20.151 19.984,20.151 20.945,21.113 20.945,21.845 22.922,23.822 23.853,23.822 v1(23.9,23.775)
NetU16_CH1_6: U16_CH1.6 U17_CH1.40 | length 16.9
  Top Layer w0.2: v1(12.225,24.275) 12.225,24.383 12.692,24.85 21.42,24.85 U16_CH1.6@22.5,23.77
  Bottom Layer w0.2: v1(12.225,24.275) 12.55,24.6 13.525,24.6 15.75,22.375 U17_CH1.40@15.75,21.115
NetU16_CH2_4: U16_CH2.4 U17_CH2.45 | length 8.8
  Top Layer w0.2: U16_CH2.4@39.508,23.762 39.508,23.775 v1(39.9,23.775)
  Bottom Layer w0.2: U17_CH2.45@34.25,21.115 34.25,20.518 34.29,20.478 34.29,20.378 34.516,20.151 35.984,20.151 36.945,21.113 36.945,21.845 38.922,23.822 39.853,23.822 v1(39.9,23.775)
NetU16_CH2_6: U16_CH2.6 U17_CH2.40 | length 16.9
  Top Layer w0.2: v1(28.225,24.275) 28.225,24.383 28.692,24.85 37.42,24.85 U16_CH2.6@38.5,23.77
  Bottom Layer w0.2: v1(28.225,24.275) 28.333,24.275 28.656,24.598 29.527,24.598 31.75,22.375 U17_CH2.40@31.75,21.115
NetU16_CH3_4: U16_CH3.4 U17_CH3.45 | length 8.8
  Top Layer w0.2: U16_CH3.4@23.508,39.762 23.508,39.775 v1(23.9,39.775)
  Bottom Layer w0.2: U17_CH3.45@18.25,37.115 18.25,36.518 18.29,36.478 18.29,36.378 18.516,36.151 19.984,36.151 20.945,37.113 20.945,37.845 22.922,39.822 23.853,39.822 v1(23.9,39.775)
NetU16_CH3_6: U16_CH3.6 U17_CH3.40 | length 16.9
  Top Layer w0.2: v1(12.225,40.275) 12.225,40.383 12.692,40.85 21.42,40.85 U16_CH3.6@22.5,39.77
  Bottom Layer w0.2: v1(12.225,40.275) 12.55,40.6 13.525,40.6 15.75,38.375 U17_CH3.40@15.75,37.115
NetU16_CH4_4: U16_CH4.4 U17_CH4.45 | length 8.8
  Top Layer w0.2: U16_CH4.4@39.508,39.762 39.508,39.775 v1(39.9,39.775)
  Bottom Layer w0.2: U17_CH4.45@34.25,37.115 34.25,36.518 34.29,36.478 34.29,36.378 34.516,36.151 35.984,36.151 36.945,37.113 36.945,37.845 38.922,39.822 39.853,39.822 v1(39.9,39.775)
NetU16_CH4_6: U16_CH4.6 U17_CH4.40 | length 16.9
  Top Layer w0.2: v1(28.225,40.275) 28.225,40.383 28.692,40.85 37.42,40.85 U16_CH4.6@38.5,39.77
  Bottom Layer w0.2: v1(28.225,40.275) 28.55,40.6 29.525,40.6 31.75,38.375 U17_CH4.40@31.75,37.115
OUT1: J1.1 U1.7 | length 37.7
  Bottom Layer w0.3: U1.7@6.5,25.172 6.5,24.101 6.324,23.925 4.651,23.925 4.475,24.101 4.475,43.55 5.425,44.5 13.894,44.5 ; 13.869,44.5 14.8,43.569 18.325,43.569 18.475,43.419 J1.1@18.475,43.25
OUT2: J1.14 U2.7 | length 38.3
  Bottom Layer w0.3: J1.14@31.525,43.25 36.075,43.25 ; 36.025,43.25 37.275,44.5 44.3,44.5 45.45,43.35 45.45,23.625 43.515,21.69 43.515,20.843 U2.7@43.5,20.828
OUT3: J1.3 U3.7 | length 23.9
  Bottom Layer w0.3: U3.7@6.5,41.172 6.5,39.926 6.324,39.75 5.301,39.75 5.125,39.926 5.125,43.05 5.975,43.9 13.519,43.9 ; 13.494,43.9 15.75,41.644 20.074,41.644 20.372,41.942 20.372,43.147 J1.3@20.475,43.25
OUT4: J1.12 U4.7 | length 24.7
  Bottom Layer w0.3: J1.12@29.475,43.244 29.625,43.094 29.625,41.969 29.969,41.625 ; 29.994,41.625 35.475,41.625 ; 35.425,41.625 37.7,43.9 43.825,43.9 44.825,42.9 44.825,39 43.515,37.69 43.515,36.843 U4.7@43.5,36.828
RST: P1.4 U5.1 | length 11.2
  Top Layer w0.2: v1(26.65,7.775) 27.2,8.325 32.075,8.325 34.885,5.515 P1.4@34.885,4.5
  Bottom Layer w0.2: U5.1@26.499,7.4 26.648,7.4 26.65,7.402 v1(26.65,7.775)
SCLK: U5.12 U17_CH1.19 U17_CH2.19 U17_CH3.19 U17_CH4.19 | length 74.2
  Top Layer w0.2: v1(22.75,5.748) 22.752,5.75 23.35,5.75 24.7,7.1 24.7,24.25 24.427,24.523 22.777,24.523 v1(22.75,24.55) 22.75,25.17 23.207,25.627 25.533,25.627 25.81,25.35 v1(25.85,25.35) ; v1(23.15,4.35) 28.65,4.35 30.475,6.175 v1(30.475,7.575)
  Bottom Layer w0.2: U17_CH1.19@16.75,12.885 16.75,9.65 20.652,5.748 v1(22.75,5.748) 22.827,5.672 22.827,4.667 23.144,4.35 v1(23.15,4.35) ; U17_CH3.19@16.75,28.885 16.75,25.9 18.155,24.495 22.695,24.495 v1(22.75,24.55) ; v1@23.008,5.898 23.652,5.898 U5.12@23.654,5.9 ; v1(25.85,25.35) 25.899,25.35 26.299,25.75 32.14,25.75 32.75,26.36 U17_CH4.19@32.75,28.885 ; v1(30.475,7.575) 30.537,7.637 30.862,7.637 32.75,9.525 U17_CH2.19@32.75,12.885
SWIM: P1.2 U5.15 | length 15.7
  Top Layer w0.2: v1(22.775,7.375) 22.175,7.375 21.55,6.75 21.55,4.4 22.25,3.7 32,3.7 P1.2@32.301,4.001
  Bottom Layer w0.2: v1(22.775,7.375) 22.798,7.398 23.5,7.398 U5.15@23.501,7.4
SYNC1: U5.16 U17_CH1.17 | length 9.2
  Bottom Layer w0.2: U17_CH1.17@17.75,12.885 17.75,11.6 21.247,8.103 23.998,8.103 24,8.102 U5.16@24,7.899
SYNC2: U5.3 U17_CH2.17 | length 12.1
  Bottom Layer w0.2: U5.3@26.346,6.4 26.348,6.402 26.703,6.402 26.844,6.542 30.917,6.542 33.5,9.125 33.5,10.75 33.75,11 U17_CH2.17@33.75,12.885
SYNC3: U5.17 U17_CH3.17 | length 26.6
  Bottom Layer w0.2: U17_CH3.17@17.75,28.885 17.79,28.845 17.79,28.06 19,26.85 19,26.025 19.375,25.65 23.975,25.65 24.45,25.175 24.45,8.152 24.5,8.102 U5.17@24.5,7.746
SYNC4: U5.2 U17_CH4.17 | length 30.6
  Bottom Layer w0.2: U5.2@26.346,6.9 U5.2@26.346,6.9 26.826,6.902 27.367,7.443 27.367,7.933 25.55,9.75 25.55,24.225 25.725,24.4 27.45,24.4 27.975,24.925 32.75,24.925 33.577,25.752 33.577,27.452 33.75,27.625 U17_CH4.17@33.75,28.885
UART_RX: J1.8 U5.20 | length 35.8
  Bottom Layer w0.2: 25.175,42.15 25.175,9.4 26,8.575 U5.20@26,7.899 ; J1.8@25.2,42.15 25.5,42.45 J1.8@25.5,43.25
UART_TX: J1.7 U5.19 | length 35.9
  Bottom Layer w0.2: J1.7@24.5,43.25 24.5,42.45 24.825,42.125 24.825,9.125 25.5,8.45 U5.19@25.5,7.746
pads on no net: J1.MP1 J1.MP2 U1_CH1.2 U1_CH1.5 U1_CH1.7 U1_CH2.2 U1_CH2.5 U1_CH2.7 U1_CH3.2 U1_CH3.5 U1_CH3.7 U1_CH4.2 U1_CH4.5 U1_CH4.7 U2_CH1.2 U2_CH1.5 U2_CH1.7 U2_CH2.2 U2_CH2.5 U2_CH2.7 U2_CH3.2 U2_CH3.5 U2_CH3.7 U2_CH4.2 U2_CH4.5 U2_CH4.7 U3_CH1.2 U3_CH1.5 U3_CH1.7 U3_CH2.2 U3_CH2.5 U3_CH2.7 U3_CH3.2 U3_CH3.5 U3_CH3.7 U3_CH4.2 U3_CH4.5 U3_CH4.7 U4_CH1.2 U4_CH1.5 U4_CH1.7 U4_CH2.2 U4_CH2.5 U4_CH2.7 U4_CH3.2 U4_CH3.5 U4_CH3.7 U4_CH4.2 U4_CH4.5 U4_CH4.7 U5.10 U5.11 U5.14 U5.18 U5_CH1.2 U5_CH1.5 U5_CH1.7 U5_CH2.2 U5_CH2.5 U5_CH2.7 U5_CH3.2 U5_CH3.5 U5_CH3.7 U5_CH4.2 U5_CH4.5 U5_CH4.7 U6_CH1.2 U6_CH1.5 U6_CH1.7 U6_CH2.2 U6_CH2.5 U6_CH2.7 U6_CH3.2 U6_CH3.5 U6_CH3.7 U6_CH4.2 U6_CH4.5 U6_CH4.7 U7_CH1.2 U7_CH1.5 U7_CH1.7 U7_CH2.2 U7_CH2.5 U7_CH2.7 U7_CH3.2 U7_CH3.5 U7_CH3.7 U7_CH4.2 U7_CH4.5 U7_CH4.7 U8_CH1.2 U8_CH1.5 U8_CH1.7 U8_CH2.2 U8_CH2.5 U8_CH2.7 U8_CH3.2 U8_CH3.5 U8_CH3.7 U8_CH4.2 U8_CH4.5 U8_CH4.7 U9_CH1.2 U9_CH1.5 U9_CH1.7 U9_CH2.2 U9_CH2.5 U9_CH2.7 U9_CH3.2 U9_CH3.5 U9_CH3.7 U9_CH4.2 U9_CH4.5 U9_CH4.7 U10_CH1.2 U10_CH1.5 U10_CH1.7 U10_CH2.2 U10_CH2.5 U10_CH2.7 U10_CH3.2 U10_CH3.5 U10_CH3.7 U10_CH4.2 U10_CH4.5 U10_CH4.7 U11_CH1.2 U11_CH1.5 U11_CH1.7 U11_CH2.2 U11_CH2.5 U11_CH2.7 U11_CH3.2 U11_CH3.5 U11_CH3.7 U11_CH4.2 U11_CH4.5 U11_CH4.7 U12_CH1.2 U12_CH1.5 U12_CH1.7 U12_CH2.2 U12_CH2.5 U12_CH2.7 U12_CH3.2 U12_CH3.5 U12_CH3.7 U12_CH4.2 U12_CH4.5 U12_CH4.7 U13_CH1.2 U13_CH1.5 U13_CH1.7 U13_CH2.2 U13_CH2.5 U13_CH2.7 U13_CH3.2 U13_CH3.5 U13_CH3.7 U13_CH4.2 U13_CH4.5 U13_CH4.7 U14_CH1.2 U14_CH1.5 U14_CH1.7 U14_CH2.2 U14_CH2.5 U14_CH2.7 U14_CH3.2 U14_CH3.5 U14_CH3.7 U14_CH4.2 U14_CH4.5 U14_CH4.7 U15_CH1.2 U15_CH1.5 U15_CH1.7 U15_CH2.2 U15_CH2.5 U15_CH2.7 U15_CH3.2 U15_CH3.5 U15_CH3.7 U15_CH4.2 U15_CH4.5 U15_CH4.7 U16_CH1.2 U16_CH1.5 U16_CH1.7 U16_CH2.2 U16_CH2.5 U16_CH2.7 U16_CH3.2 U16_CH3.5 U16_CH3.7 U16_CH4.2 U16_CH4.5 U16_CH4.7 U17_CH1.15 U17_CH1.16 U17_CH1.20 U17_CH1.21 U17_CH1.22 U17_CH1.42 U17_CH1.44 U17_CH2.15 U17_CH2.16 U17_CH2.20 U17_CH2.21 U17_CH2.22 U17_CH2.42 U17_CH2.44 U17_CH3.15 U17_CH3.16 U17_CH3.20 U17_CH3.21 U17_CH3.22 U17_CH3.42 U17_CH3.44 U17_CH4.15 U17_CH4.16 U17_CH4.20 U17_CH4.21 U17_CH4.22 U17_CH4.42 U17_CH4.44

## Polygon pours and split planes (outlines as drawn)
+5V on VCC "+5V_L02_P000" (solid, pour order 0): 1,1 49,1 49,49 1,49
GND on GND "GND_L03_P001" (solid, pour order 1): 1,1 49,1 49,49 1,49

## Other copper
Bottom Layer:
  rectangle net GND: 30.125,28.15 30.9,29.625
  rectangle net +5V: 35.1,27.475 35.9,29.625
  rectangle net GND: 14.125,28.15 14.9,29.625
  rectangle net +5V: 19.1,27.475 19.9,29.625
  rectangle net GND: 14.125,12.15 14.9,13.625
  rectangle net +5V: 19.1,11.475 19.9,13.625
  rectangle net +5V: 35.1,11.475 35.9,13.625
  rectangle net GND: 30.125,12.15 30.9,13.625

## Silkscreen, mask and mechanical layers (free items; w line width, h text height)
Bottom Overlay:
  text "CH1" at 18.997,41.697 h1 r90
  text "CH3" at 20.997,41.697 h1 r90
  text "+5V" at 22.997,41.697 h1 r90
  text "TX" at 24.867,41.697 h1 r90
  text "RX" at 26.127,41.697 h1 r90
  text "-5V" at 27.997,41.697 h1 r90
  text "CH4" at 29.997,41.697 h1 r90
  text "CH2" at 31.997,41.697 h1 r90
  text "NRST" at 35.482,9.518 h1 r90
  text "SWIM" at 32.942,9.352 h1 r90
  text "+5V" at 31.647,8.519 h1 r90
  text "GND" at 34.212,8.519 h1 r90

## Text inside footprints (layer, text, board x,y; h text height)
U1: Mechanical 13 "*" at 7.203,21.514 h1.27 r270; Bottom Overlay "*" at 8.203,20.257 h1.27 r270
U2: Mechanical 13 "*" at 42.797,24.486 h1.27 r90; Bottom Overlay "*" at 41.797,25.743 h1.27 r90
U3: Mechanical 13 "*" at 7.203,37.514 h1.27 r270; Bottom Overlay "*" at 8.203,36.257 h1.27 r270
U4: Mechanical 13 "*" at 42.797,40.486 h1.27 r90; Bottom Overlay "*" at 41.797,41.743 h1.27 r90
U5: Mechanical 13 "*" at 26.207,7.015 h1.27; Bottom Overlay "*" at 27.781,7.015 h1.27
U17_CH1: Mechanical 13 "*" at 20.442,19.365 h1.27; Bottom Overlay "*" at 22.829,19.746 h1.27
U17_CH2: Mechanical 13 "*" at 36.442,19.365 h1.27; Bottom Overlay "*" at 38.829,19.746 h1.27
U17_CH3: Mechanical 13 "*" at 20.442,35.365 h1.27; Bottom Overlay "*" at 22.829,35.746 h1.27
U17_CH4: Mechanical 13 "*" at 36.442,35.365 h1.27; Bottom Overlay "*" at 38.829,35.746 h1.27